# Altium PCB FPv1.3.2.PcbDoc (part 4 of 9)
Units mm, origin at the board's own origin, x right, y up, seen from the top; angles counter-clockwise.
Board outline 81.28 x 53.34 mm, 4 copper layers (Top Layer, GROUND PLANE, POWER PLANE, Bottom Layer); 98 components, 183 nets, 614 pads, 312 vias.
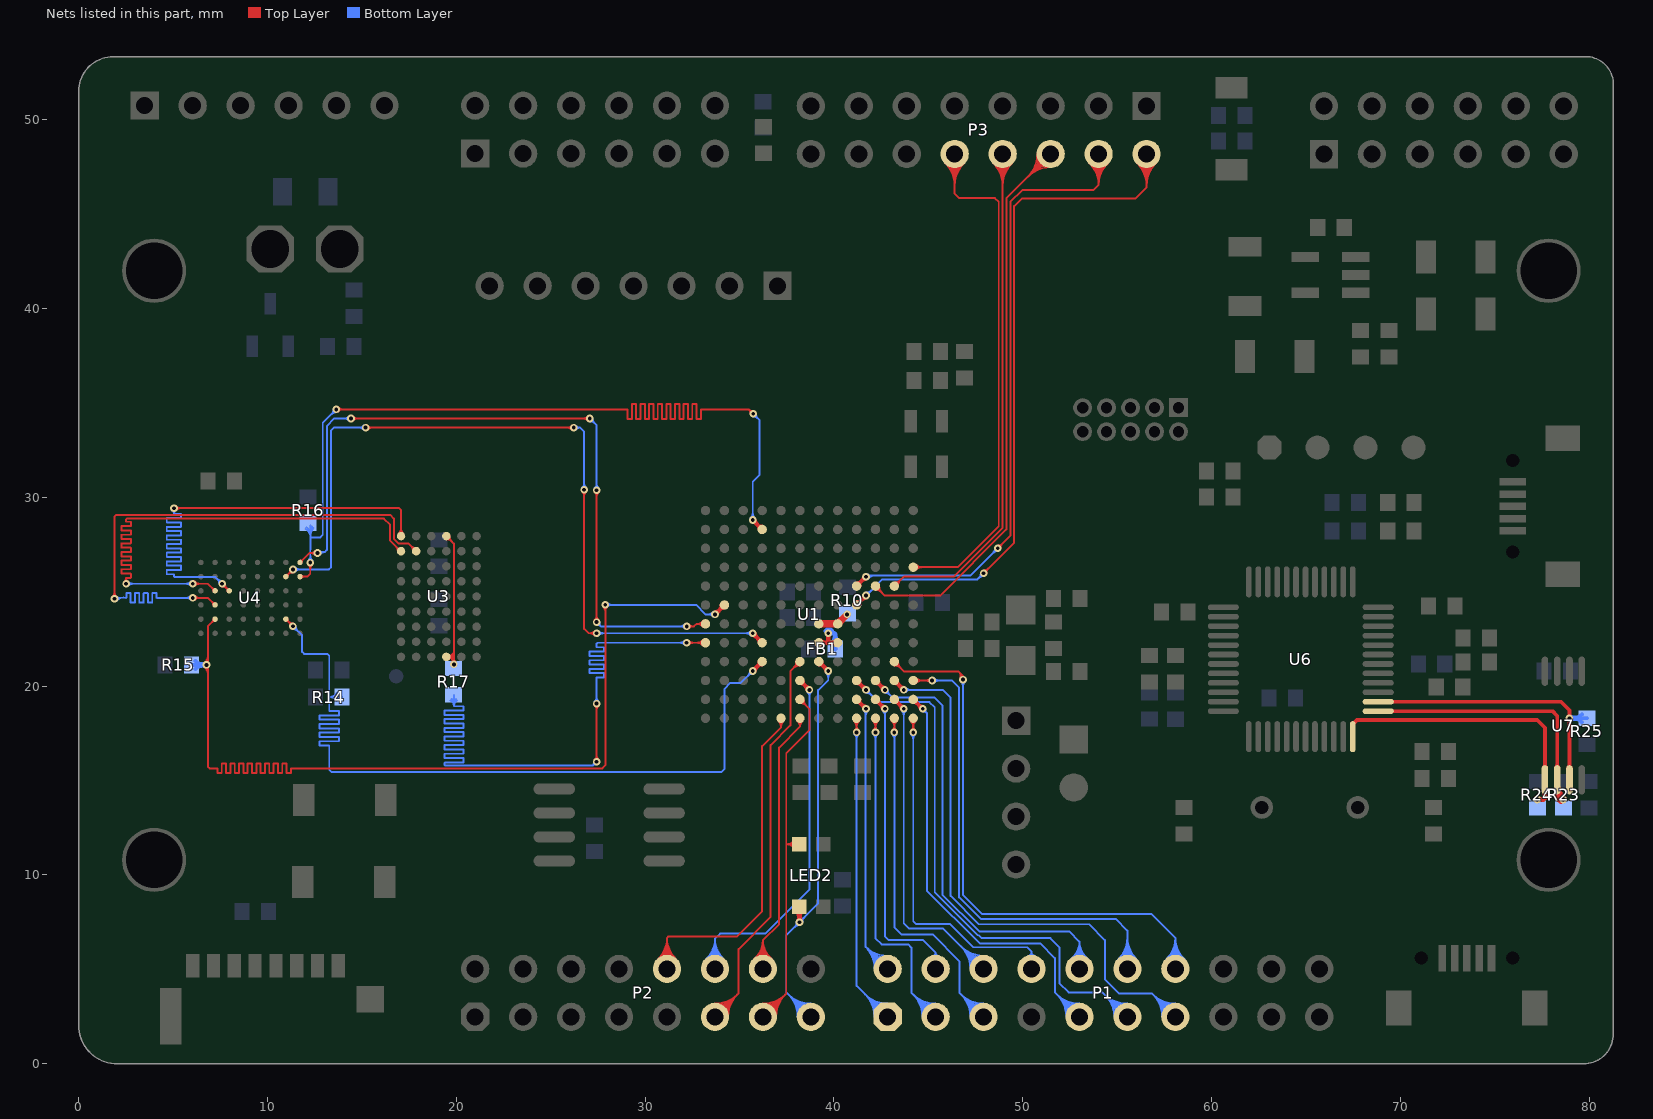
[diagram p6: the nets of this part, all layers, seen from the top]

## Via types
v1: diameter 0.403, hole 0.2, Top Layer to Bottom Layer, tented both sides, 261 vias
v2: diameter 0.503, hole 0.3, Top Layer to Bottom Layer, tented both sides, 25 vias
v3: diameter 0.6, hole 0.4, Top Layer to Bottom Layer, tented both sides, 11 vias
v4: diameter 0.508, hole 0.33, Top Layer to Bottom Layer, tented both sides, 5 vias
v5: diameter 0.703, hole 0.4, Top Layer to Bottom Layer, tented both sides, 3 vias
v6: diameter 0.603, hole 0.4, Top Layer to Bottom Layer, tented both sides, 2 vias
v7: diameter 0.503, hole 0.25, Top Layer to Bottom Layer, tented both sides, 2 vias
v8: diameter 0.6, hole 0.24, Top Layer to Bottom Layer, tented both sides, 1 vias
v9: diameter 0.508, hole 0.349, Top Layer to Bottom Layer, tented both sides, 1 vias
v10: diameter 0.603, hole 0.3, Top Layer to Bottom Layer, tented both sides, 1 vias

## Nets (pads, with @x,y where several pads share a name; then routed paths per layer and width w, separated by ;. In a path a pad name is that pad's centre, name@x,y a point inside that pad or via, vN(x,y) a via of type N, cw(c..) or ccw(c..) an arc to the next point about the centre after c; other vN are vias at no path point) (continued)
ADDR13: U3.B1 U4.G3 | length 33.1
  Top Layer w0.102: v1@2.432,25.551 ccw(c2.331,25.705) 2.515,25.705 ; v1(2.515,25.425) 2.515,25.705 ; v1@2.597,25.551 cw(c2.698,25.705) 2.515,25.705 ; v1(6.05,25.425) 6.85,25.425 U4.G3@7.225,25.05 ; v1@6.157,25.318 cw(c6.414,25.061) 6.414,25.425 cw(c6.414,25.789) v1@6.157,25.532 ; U4.G3@7.131,25.05 ccw(c6.903,25.05) 7.064,25.211 ccw(c7.225,25.372) U4.G3@7.225,25.144 ; 16.793,27.411 cw(c16.531,27.15) U3.B1@16.901,27.15 ; U3.B1@17.075,27.15 17.054,27.15 16.494,27.71 16.494,28.54 16.166,28.868 2.562,28.868 2.515,28.82 2.515,28.729 ccw(c2.537,28.729) 2.537,28.706 2.746,28.706 cw(c2.746,28.683) 2.769,28.683 2.769,28.5 cw(c2.746,28.5) 2.746,28.477 2.515,28.477 2.283,28.477 ccw(c2.283,28.455) 2.261,28.455 2.261,28.272 ccw(c2.283,28.272) 2.283,28.249 2.515,28.249 2.746,28.249 cw(c2.746,28.226) 2.769,28.226 2.769,28.043 cw(c2.746,28.043) 2.746,28.02 2.515,28.02 2.283,28.02 ccw(c2.283,27.997) 2.261,27.997 2.261,27.815 ccw(c2.283,27.815) 2.283,27.792 2.515,27.792 2.746,27.792 cw(c2.746,27.769) 2.769,27.769 2.769,27.586 cw(c2.746,27.586) 2.746,27.563 2.515,27.563 2.283,27.563 ccw(c2.283,27.54) 2.261,27.54 2.261,27.357 ccw(c2.283,27.357) 2.283,27.334 2.515,27.334 2.746,27.334 cw(c2.746,27.312) 2.769,27.312 2.769,27.129 cw(c2.746,27.129) 2.746,27.106 2.515,27.106 2.283,27.106 ccw(c2.283,27.083) 2.261,27.083 2.261,26.9 ccw(c2.283,26.9) 2.283,26.877 2.515,26.877 2.746,26.877 cw(c2.746,26.854) 2.769,26.854 2.769,26.672 cw(c2.746,26.672) 2.746,26.649 2.515,26.649 2.283,26.649 ccw(c2.283,26.626) 2.261,26.626 2.261,26.443 ccw(c2.283,26.443) 2.283,26.42 2.515,26.42 2.746,26.42 cw(c2.746,26.397) 2.769,26.397 2.769,26.214 cw(c2.746,26.214) 2.746,26.191 2.515,26.191 2.283,26.191 ccw(c2.283,26.169) 2.261,26.169 2.261,25.986 ccw(c2.283,25.986) 2.283,25.963 2.515,25.963 2.746,25.963 cw(c2.746,25.94) 2.769,25.94 2.769,25.757 cw(c2.746,25.757) 2.746,25.734 2.537,25.734 ccw(c2.537,25.711) 2.515,25.711 2.515,25.705
  Bottom Layer w0.102: v1(2.515,25.425) v1(6.05,25.425) ; v1@2.621,25.319 cw(c2.877,25.063) 2.877,25.425 ; v1@2.621,25.532 ccw(c2.879,25.79) 2.879,25.425 ; v1@5.943,25.318 ccw(c5.686,25.061) 5.686,25.425 ccw(c5.686,25.789) v1@5.943,25.532
ADDR14: U3.B2 U4.G4 | length 34.2
  Top Layer w0.102: v1@1.793,24.732 ccw(c1.536,24.989) 1.9,24.989 ccw(c2.264,24.989) v1@2.007,24.732 ; v1(1.9,24.625) 1.9,28.975 1.996,29.071 16.496,29.071 16.698,28.87 16.698,27.794 16.941,27.55 17.475,27.55 U3.B2@17.875,27.15 ; v1(6.05,24.675) 6.85,24.675 U4.G4@7.225,24.3 ; v1@6.157,24.568 cw(c6.414,24.311) 6.414,24.675 cw(c6.414,25.039) v1@6.157,24.782 ; U4.G4@7.131,24.3 ccw(c6.903,24.3) 7.064,24.461 ccw(c7.225,24.622) U4.G4@7.225,24.394 ; U3.B2@17.701,27.15 ccw(c17.28,27.15) 17.578,27.447 ccw(c17.875,27.745) U3.B2@17.875,27.324
  Bottom Layer w0.102: v1@1.936,24.592 cw(c2.143,24.4) 2.132,24.682 ; v1@1.95,24.675 2.527,24.698 ; v1@2.002,24.736 ccw(c2.138,24.883) 2.146,24.683 ; v1@2.011,24.523 cw(c2.398,24.165) 2.377,24.692 ; 2.504,24.675 ccw(c2.504,24.698) 2.527,24.698 ; v1@5.943,24.568 ccw(c5.686,24.311) 5.686,24.675 ccw(c5.686,25.039) v1@5.943,24.782 ; v1(6.05,24.675) 4.15,24.675 cw(c4.15,24.698) 4.127,24.698 4.127,24.906 ccw(c4.105,24.906) 4.105,24.929 3.922,24.929 ccw(c3.922,24.906) 3.899,24.906 3.899,24.444 cw(c3.876,24.444) 3.876,24.421 3.693,24.421 cw(c3.693,24.444) 3.67,24.444 3.67,24.906 ccw(c3.647,24.906) 3.647,24.929 3.465,24.929 ccw(c3.465,24.906) 3.442,24.906 3.442,24.444 cw(c3.419,24.444) 3.419,24.421 3.236,24.421 cw(c3.236,24.444) 3.213,24.444 3.213,24.906 ccw(c3.19,24.906) 3.19,24.929 3.007,24.929 ccw(c3.007,24.906) 2.984,24.906 2.984,24.444 cw(c2.962,24.444) 2.962,24.421 2.779,24.421 cw(c2.779,24.444) 2.756,24.444 2.756,24.906 ccw(c2.733,24.906) 2.733,24.929 2.55,24.929 ccw(c2.55,24.906) 2.527,24.906 2.527,24.698
ADDR15: U3.A1 U4.F3 | length 33.8
  Top Layer w0.102: v1@5.157,29.318 cw(c5.411,29.064) 5.411,29.424 ; v1@5.157,29.532 ccw(c5.416,29.791) 5.416,29.424 ; v1@7.6,25.274 cw(c7.6,24.91) 7.857,25.168 cw(c8.115,25.425) v1@7.751,25.425 ; v1(7.6,25.425) U4.F3@7.975,25.05 ; U4.F3@7.881,25.05 ccw(c7.653,25.05) 7.814,25.211 ccw(c7.975,25.372) U4.F3@7.975,25.144 ; U3.A1@16.952,28.073 ccw(c16.654,28.371) 17.075,28.371 ccw(c17.496,28.371) U3.A1@17.198,28.073 ; U3.A1@17.075,27.95 17.075,29.325 16.976,29.424 v1@5.049,29.424 ; v1@5.049,29.424 v1(5.05,29.425)
  Bottom Layer w0.102: v1@4.968,29.298 cw(c4.872,29.149) 5.05,29.149 ; v1(5.05,29.425) 5.05,29.149 ; v1@5.132,29.298 ccw(c5.228,29.149) 5.05,29.149 ; v1@7.449,25.425 ccw(c7.085,25.425) 7.343,25.682 ccw(c7.6,25.94) v1@7.6,25.576 ; v1(7.6,25.425) 7.246,25.779 5.082,25.779 5.05,25.811 5.05,25.902 ccw(c5.027,25.902) 5.027,25.925 4.692,25.925 cw(c4.692,25.948) 4.669,25.948 4.669,26.131 cw(c4.692,26.131) 4.692,26.154 5.408,26.154 ccw(c5.408,26.177) 5.431,26.177 5.431,26.36 ccw(c5.408,26.36) 5.408,26.382 4.692,26.382 cw(c4.692,26.405) 4.669,26.405 4.669,26.588 cw(c4.692,26.588) 4.692,26.611 5.408,26.611 ccw(c5.408,26.634) 5.431,26.634 5.431,26.817 ccw(c5.408,26.817) 5.408,26.84 4.692,26.84 cw(c4.692,26.863) 4.669,26.863 4.669,27.045 cw(c4.692,27.045) 4.692,27.068 5.408,27.068 ccw(c5.408,27.091) 5.431,27.091 5.431,27.274 ccw(c5.408,27.274) 5.408,27.297 4.692,27.297 cw(c4.692,27.32) 4.669,27.32 4.669,27.503 cw(c4.692,27.503) 4.692,27.525 5.408,27.525 ccw(c5.408,27.548) 5.431,27.548 5.431,27.731 ccw(c5.408,27.731) 5.408,27.754 4.692,27.754 cw(c4.692,27.777) 4.669,27.777 4.669,27.96 cw(c4.692,27.96) 4.692,27.983 5.408,27.983 ccw(c5.408,28.006) 5.431,28.006 5.431,28.188 ccw(c5.408,28.188) 5.408,28.211 4.692,28.211 cw(c4.692,28.234) 4.669,28.234 4.669,28.417 cw(c4.692,28.417) 4.692,28.44 5.408,28.44 ccw(c5.408,28.463) 5.431,28.463 5.431,28.646 ccw(c5.408,28.646) 5.408,28.668 4.692,28.668 cw(c4.692,28.691) 4.669,28.691 4.669,28.874 cw(c4.692,28.874) 4.692,28.897 5.408,28.897 ccw(c5.408,28.92) 5.431,28.92 5.431,29.103 ccw(c5.408,29.103) 5.408,29.126 5.073,29.126 cw(c5.073,29.149) 5.05,29.149
AGND: R10.2 U1.G6 U1.H6 | length 1.7
  Top Layer w0.381: U1.G6@39.2,23.3 U1.H6@40.2,23.3 v1(40.7,23.8)
ALE: R17.2 U3.A4 U3.J4 | length 11.8
  Top Layer w0.102: U3.J4@19.475,21.55 U3.J4@19.65,21.55 ; U3.A4@19.475,27.776 cw(c19.475,27.355) 19.772,27.653 cw(c20.07,27.95) U3.A4@19.649,27.95 ; U3.A4@19.475,27.95 19.875,27.55 19.875,27.3 19.875,21.775 ; U3.J4@19.608,21.438 cw(c19.85,21.233) 19.85,21.55 ; U3.J4@19.608,21.662 ccw(c19.85,21.867) 19.85,21.55 ; v1@19.759,21.246 ccw(c19.643,21.343) 19.75,21.45 ; 19.829,21.371 cw(c19.729,21.272) v1@19.837,21.181 ; 19.85,21.453 cw(c19.572,21.453) 19.768,21.257 ccw(c19.511,21.514) 19.875,21.514 ccw(c20.239,21.514) v1@19.982,21.257 ; 19.85,21.55 ccw(c20.242,21.55) v1@19.977,21.261 ; U3.J4@19.65,21.55 19.763,21.663 ; U3.J4@19.65,21.55 19.85,21.55 ; U3.J4@19.65,21.55 19.75,21.45 ; 19.75,21.45 19.85,21.55 ; 19.75,21.45 19.85,21.35 ; 19.763,21.663 19.763,21.637 19.85,21.55 ; 19.763,21.663 19.85,21.75 ; 19.85,21.35 19.85,21.175 v1(19.875,21.15) ; 19.85,21.35 19.85,21.55 ; 19.85,21.35 19.875,21.325 v1(19.875,21.15) ; 19.85,21.55 19.85,21.75 ; 19.85,21.75 19.875,21.775 ; v1(19.875,21.15) 19.875,21.775
ANALOG1: P1.1 U1.J1 | length 26.7
  Top Layer w0.102: U1.J1@41.059,18.159 cw(c40.719,17.819) 41.2,17.819 cw(c41.681,17.819) U1.J1@41.341,18.159 ; v1@41.093,17.658 ccw(c40.836,17.915) 41.2,17.915 ccw(c41.564,17.915) v1@41.307,17.658 ; v1(41.2,17.551) U1.J1@41.2,18.3
  Bottom Layer w0.102: v1@41.093,17.445 cw(c40.836,17.188) 41.2,17.188 cw(c41.564,17.188) v1@41.307,17.445 ; v1(41.2,17.551) 41.2,4.13 P1.1@42.845,2.485 ; P1.1@42.146,2.485 ccw(c40.458,2.485) 41.651,3.679 ccw(c42.845,4.872) P1.1@42.845,3.184 ; P1.1@42.247,2.485 ccw(c40.805,2.485) 41.825,3.505 ccw(c42.845,4.525) P1.1@42.845,3.083 ; P1.1@42.349,2.485 ccw(c41.152,2.485) 41.998,3.332 ccw(c42.845,4.178) P1.1@42.845,2.981 ; P1.1@42.451,2.485 ccw(c41.498,2.485) 42.172,3.158 ccw(c42.845,3.832) P1.1@42.845,2.879
ANALOG2: P1.2 U1.J2 | length 27.1
  Top Layer w0.102: U1.J2@41.2,19.101 cw(c41.2,18.62) 41.54,18.96 cw(c41.88,19.3) U1.J2@41.399,19.3 ; U1.J2@41.2,19.3 v1(41.7,18.8) ; U1.J2@41.295,19.101 cw(c41.018,18.621) v1@41.554,18.762 ; U1.J2@41.399,19.205 ccw(c41.879,19.482) v1@41.738,18.946 ; 41.506,18.98 cw(c41.349,18.708) v1@41.653,18.788 ; 41.511,18.977 cw(c41.458,18.885) v1@41.558,18.85 ; 41.52,18.994 ccw(c41.792,19.151) v1@41.712,18.847 ; 41.523,18.989 ccw(c41.615,19.042) v1@41.65,18.942 ; v1@41.549,18.8 ccw(c41.185,18.8) 41.443,19.057 ccw(c41.7,19.315) v1@41.7,18.951 ; 41.537,18.962 ccw(c41.619,19.104) 41.661,18.946 cw(c41.619,19.104) 41.537,18.962 ; 41.538,18.963 cw(c41.396,18.881) 41.554,18.839 ccw(c41.396,18.881) 41.538,18.963
  Bottom Layer w0.102: v1@41.593,18.693 cw(c41.397,18.497) 41.675,18.497 ; 41.675,18.376 cw(c42.124,18.376) v1@41.807,18.693 ; v1@41.675,18.825 41.675,6.195 ; P1.2@42.146,5.035 ccw(c40.538,5.058) 41.675,6.195 ; P1.2@42.247,5.034 ccw(c40.873,5.053) 41.845,6.025 ccw(c42.817,6.997) P1.2@42.836,5.623 ; P1.2@42.349,5.032 ccw(c41.208,5.048) 42.015,5.855 ccw(c42.822,6.662) P1.2@42.838,5.521 ; P1.2@42.451,5.031 ccw(c41.544,5.044) 42.185,5.685 ccw(c42.826,6.326) P1.2@42.839,5.419 ; P1.2@42.835,5.724 cw(c42.812,7.332) 41.675,6.195 ; P1.2@42.845,5.025 41.675,6.195
ANALOG3: P1.3 U1.K1 | length 28.1
  Top Layer w0.102: U1.K1@42.059,18.159 cw(c41.719,17.819) 42.2,17.819 cw(c42.681,17.819) U1.K1@42.341,18.159 ; v1@42.093,17.658 ccw(c41.836,17.915) 42.2,17.915 ccw(c42.564,17.915) v1@42.307,17.658 ; v1(42.2,17.551) U1.K1@42.2,18.3
  Bottom Layer w0.102: v1@42.093,17.445 cw(c41.836,17.188) 42.2,17.188 cw(c42.564,17.188) v1@42.307,17.445 ; v1(42.2,17.551) 42.2,6.65 42.525,6.325 43.925,6.325 44.1,6.15 44.1,3.77 P1.3@45.385,2.485 ; P1.3@44.686,2.485 ccw(c42.998,2.485) 44.191,3.679 ccw(c45.385,4.872) P1.3@45.385,3.184 ; P1.3@44.787,2.485 ccw(c43.345,2.485) 44.365,3.505 ccw(c45.385,4.525) P1.3@45.385,3.083 ; P1.3@44.889,2.485 ccw(c43.692,2.485) 44.538,3.332 ccw(c45.385,4.178) P1.3@45.385,2.981 ; P1.3@44.991,2.485 ccw(c44.038,2.485) 44.712,3.158 ccw(c45.385,3.832) P1.3@45.385,2.879
ANALOG4: P1.4 U1.K2 | length 21.2
  Top Layer w0.102: U1.K2@42.2,19.101 cw(c42.2,18.62) 42.54,18.96 cw(c42.88,19.3) U1.K2@42.399,19.3 ; U1.K2@42.2,19.3 v1(42.7,18.8) ; U1.K2@42.295,19.101 cw(c42.018,18.621) v1@42.554,18.762 ; U1.K2@42.399,19.205 ccw(c42.879,19.482) v1@42.738,18.946 ; 42.506,18.98 cw(c42.349,18.708) v1@42.653,18.788 ; 42.511,18.977 cw(c42.458,18.885) v1@42.558,18.85 ; 42.52,18.994 ccw(c42.792,19.151) v1@42.712,18.847 ; 42.523,18.989 ccw(c42.615,19.042) v1@42.65,18.942 ; v1@42.549,18.8 ccw(c42.185,18.8) 42.443,19.057 ccw(c42.7,19.315) v1@42.7,18.951 ; 42.537,18.962 ccw(c42.619,19.104) 42.661,18.946 cw(c42.619,19.104) 42.537,18.962 ; 42.538,18.963 cw(c42.396,18.881) 42.554,18.839 ccw(c42.396,18.881) 42.538,18.963
  Bottom Layer w0.102: v1@42.593,18.693 cw(c42.336,18.436) 42.7,18.436 cw(c43.064,18.436) v1@42.807,18.693 ; v1(42.7,18.8) 42.7,6.75 42.903,6.547 44.728,6.547 45.385,5.89 ; P1.4@45.238,5.709 ccw(c45.2,5.89) 45.385,5.89 ; P1.4@45.385,5.025 45.385,5.89 ; P1.4@45.532,5.709 cw(c45.57,5.89) 45.385,5.89
ANALOG5: P1.5 U1.L1 | length 28.9
  Top Layer w0.102: U1.L1@43.059,18.159 cw(c42.719,17.819) 43.2,17.819 cw(c43.681,17.819) U1.L1@43.341,18.159 ; v1@43.093,17.658 ccw(c42.836,17.915) 43.2,17.915 ccw(c43.564,17.915) v1@43.307,17.658 ; v1(43.2,17.551) U1.L1@43.2,18.3
  Bottom Layer w0.102: v1@43.093,17.445 cw(c42.836,17.188) 43.2,17.188 cw(c43.564,17.188) v1@43.307,17.445 ; v1(43.2,17.551) 43.2,7.225 43.575,6.85 45.225,6.85 46.65,5.425 46.65,3.76 P1.5@47.925,2.485 ; P1.5@47.226,2.485 ccw(c45.538,2.485) 46.731,3.679 ccw(c47.925,4.872) P1.5@47.925,3.184 ; P1.5@47.327,2.485 ccw(c45.885,2.485) 46.905,3.505 ccw(c47.925,4.525) P1.5@47.925,3.083 ; P1.5@47.429,2.485 ccw(c46.232,2.485) 47.078,3.332 ccw(c47.925,4.178) P1.5@47.925,2.981 ; P1.5@47.531,2.485 ccw(c46.578,2.485) 47.252,3.158 ccw(c47.925,3.832) P1.5@47.925,2.879
ANALOG6: P1.6 U1.L2 | length 29.7
  Top Layer w0.102: U1.L2@43.2,19.101 cw(c43.2,18.62) 43.54,18.96 cw(c43.88,19.3) U1.L2@43.399,19.3 ; U1.L2@43.2,19.3 v1(43.7,18.8) ; U1.L2@43.295,19.101 cw(c43.018,18.621) v1@43.554,18.762 ; U1.L2@43.399,19.205 ccw(c43.879,19.482) v1@43.738,18.946 ; 43.506,18.98 cw(c43.349,18.708) v1@43.653,18.788 ; 43.511,18.977 cw(c43.458,18.885) v1@43.558,18.85 ; 43.52,18.994 ccw(c43.792,19.151) v1@43.712,18.847 ; 43.523,18.989 ccw(c43.615,19.042) v1@43.65,18.942 ; v1@43.549,18.8 ccw(c43.185,18.8) 43.443,19.057 ccw(c43.7,19.315) v1@43.7,18.951 ; 43.537,18.962 ccw(c43.619,19.104) 43.661,18.946 cw(c43.619,19.104) 43.537,18.962 ; 43.538,18.963 cw(c43.396,18.881) 43.554,18.839 ccw(c43.396,18.881) 43.538,18.963
  Bottom Layer w0.102: v1@43.593,18.693 cw(c43.336,18.436) 43.7,18.436 cw(c44.064,18.436) v1@43.807,18.693 ; v1(43.7,18.8) 43.7,7.45 43.975,7.175 45.775,7.175 P1.6@47.925,5.025 ; P1.6@47.226,5.025 ccw(c45.538,5.025) 46.731,6.219 ccw(c47.925,7.412) P1.6@47.925,5.724 ; P1.6@47.327,5.025 ccw(c45.885,5.025) 46.905,6.045 ccw(c47.925,7.065) P1.6@47.925,5.623 ; P1.6@47.429,5.025 ccw(c46.232,5.025) 47.078,5.872 ccw(c47.925,6.718) P1.6@47.925,5.521 ; P1.6@47.531,5.025 ccw(c46.578,5.025) 47.252,5.698 ccw(c47.925,6.372) P1.6@47.925,5.419
ANALOG7: P1.8 U1.M1 | length 21.7
  Top Layer w0.102: U1.M1@44.059,18.159 cw(c43.719,17.819) 44.2,17.819 cw(c44.681,17.819) U1.M1@44.341,18.159 ; v1@44.089,17.658 ccw(c43.823,17.925) 44.2,17.925 ; v1@44.2,17.555 U1.M1@44.2,18.3 ; 44.2,17.906 ccw(c44.55,17.906) v1@44.303,17.658
  Bottom Layer w0.102: v1@44.089,17.445 cw(c43.823,17.178) 44.2,17.178 ; 44.2,17.197 cw(c44.55,17.197) v1@44.303,17.445 ; v1@44.2,17.551 44.2,7.55 44.35,7.4 46.15,7.4 47.379,6.171 50.229,6.171 50.465,5.935 ; P1.8@50.285,5.701 ccw(c50.222,5.935) 50.465,5.935 ; P1.8@50.311,5.602 ccw(c50.258,5.803) 50.465,5.803 ccw(c50.672,5.803) P1.8@50.619,5.602 ; P1.8@50.465,5.025 50.465,5.935 ; P1.8@50.645,5.701 cw(c50.708,5.935) 50.465,5.935
  other v1: 44.196,17.551
ANALOG8: P1.9 U1.M2 | length 34.6
  Top Layer w0.102: U1.M2@44.2,19.101 cw(c44.2,18.62) 44.54,18.96 cw(c44.88,19.3) U1.M2@44.399,19.3 ; U1.M2@44.2,19.3 v1(44.7,18.8) ; U1.M2@44.295,19.101 cw(c44.018,18.621) v1@44.554,18.762 ; U1.M2@44.399,19.205 ccw(c44.879,19.482) v1@44.738,18.946 ; 44.506,18.98 cw(c44.349,18.708) v1@44.653,18.788 ; 44.511,18.977 cw(c44.458,18.885) v1@44.558,18.85 ; 44.52,18.994 ccw(c44.792,19.151) v1@44.712,18.847 ; 44.523,18.989 ccw(c44.615,19.042) v1@44.65,18.942 ; v1@44.549,18.8 ccw(c44.185,18.8) 44.443,19.057 ccw(c44.7,19.315) v1@44.7,18.951 ; 44.537,18.962 ccw(c44.619,19.104) 44.661,18.946 cw(c44.619,19.104) 44.537,18.962 ; 44.538,18.963 cw(c44.396,18.881) 44.554,18.839 ccw(c44.396,18.881) 44.538,18.963
  Bottom Layer w0.102: v1(44.7,18.8) 44.925,18.575 ; v1@44.715,18.65 cw(c44.741,18.391) 44.925,18.575 ; v1@44.85,18.785 ccw(c45.109,18.759) 44.925,18.575 ; P1.9@52.306,2.485 ccw(c50.618,2.485) 51.811,3.679 ccw(c53.005,4.872) P1.9@53.005,3.184 ; P1.9@52.407,2.485 ccw(c50.965,2.485) 51.985,3.505 ccw(c53.005,4.525) P1.9@53.005,3.083 ; P1.9@52.509,2.485 ccw(c51.312,2.485) 52.158,3.332 ccw(c53.005,4.178) P1.9@53.005,2.981 ; P1.9@52.611,2.485 ccw(c51.658,2.485) 52.332,3.158 ccw(c53.005,3.832) P1.9@53.005,2.879 ; P1.9@53.005,2.485 51.7,3.79 51.7,5.602 50.928,6.374 47.726,6.374 44.925,9.175 44.925,18.575
ANALOG9: P1.10 U1.K3 | length 34.4
  Top Layer w0.102: U1.K3@42.2,20.101 cw(c42.2,19.62) 42.54,19.96 cw(c42.88,20.3) U1.K3@42.399,20.3 ; U1.K3@42.2,20.3 v1(42.7,19.8) ; U1.K3@42.295,20.101 cw(c42.018,19.621) v1@42.554,19.762 ; U1.K3@42.399,20.205 ccw(c42.879,20.482) v1@42.738,19.946 ; 42.506,19.98 cw(c42.349,19.708) v1@42.653,19.788 ; 42.511,19.977 cw(c42.458,19.885) v1@42.558,19.85 ; 42.52,19.994 ccw(c42.792,20.151) v1@42.712,19.847 ; 42.523,19.989 ccw(c42.615,20.042) v1@42.65,19.942 ; v1@42.549,19.8 ccw(c42.185,19.8) 42.443,20.057 ccw(c42.7,20.315) v1@42.7,19.951 ; 42.537,19.962 ccw(c42.619,20.104) 42.661,19.946 cw(c42.619,20.104) 42.537,19.962 ; 42.538,19.963 cw(c42.396,19.881) 42.554,19.839 ccw(c42.396,19.881) 42.538,19.963
  Bottom Layer w0.102: v1@42.7,19.649 cw(c42.7,19.285) 42.957,19.543 cw(c43.215,19.8) v1@42.851,19.8 ; v1(42.7,19.8) 43.094,19.406 45.319,19.406 45.745,18.98 45.745,8.966 47.701,7.01 52.465,7.01 53.005,6.47 ; P1.10@52.571,5.573 ccw(c51.862,6.47) 53.005,6.47 ; P1.10@52.634,5.494 ccw(c52.028,6.26) 53.005,6.26 ccw(c53.982,6.26) P1.10@53.376,5.494 ; P1.10@52.697,5.414 ccw(c52.194,6.05) 53.005,6.05 ccw(c53.816,6.05) P1.10@53.313,5.414 ; P1.10@52.76,5.334 ccw(c52.36,5.84) 53.005,5.84 ccw(c53.65,5.84) P1.10@53.25,5.334 ; P1.10@53.005,5.025 53.005,6.47 ; P1.10@53.439,5.573 cw(c54.148,6.47) 53.005,6.47
ANALOG10: P1.11 U1.J3 | length 41.6
  Top Layer w0.102: U1.J3@41.2,20.101 cw(c41.2,19.62) 41.54,19.96 cw(c41.88,20.3) U1.J3@41.399,20.3 ; U1.J3@41.2,20.3 v1(41.7,19.8) ; U1.J3@41.295,20.101 cw(c41.018,19.621) v1@41.554,19.762 ; U1.J3@41.399,20.205 ccw(c41.879,20.482) v1@41.738,19.946 ; 41.506,19.98 cw(c41.349,19.708) v1@41.653,19.788 ; 41.511,19.977 cw(c41.458,19.885) v1@41.558,19.85 ; 41.52,19.994 ccw(c41.792,20.151) v1@41.712,19.847 ; 41.523,19.989 ccw(c41.615,20.042) v1@41.65,19.942 ; v1@41.549,19.8 ccw(c41.185,19.8) 41.443,20.057 ccw(c41.7,20.315) v1@41.7,19.951 ; 41.537,19.962 ccw(c41.619,20.104) 41.661,19.946 cw(c41.619,20.104) 41.537,19.962 ; 41.538,19.963 cw(c41.396,19.881) 41.554,19.839 ccw(c41.396,19.881) 41.538,19.963
  Bottom Layer w0.102: v1@41.7,19.649 cw(c41.7,19.285) 41.957,19.543 cw(c42.215,19.8) v1@41.851,19.8 ; v1(41.7,19.8) 42.348,19.152 42.551,19.152 42.553,19.154 42.847,19.154 42.849,19.152 43.551,19.152 43.553,19.154 43.847,19.154 43.849,19.152 44.551,19.152 44.553,19.154 45.057,19.154 45.339,18.872 45.339,9.085 47.617,6.807 47.675,6.807 47.827,6.655 51.46,6.655 51.943,6.172 51.943,4.267 52.426,3.785 54.215,3.785 55.515,2.485 P1.11@55.545,2.485 ; 54.3,3.7 ccw(c55.545,4.945) P1.11@55.545,3.184 ; 54.373,3.627 cw(c53.23,2.485) P1.11@54.846,2.485 ; 54.474,3.526 ccw(c55.545,4.598) P1.11@55.545,3.083 ; 54.546,3.454 cw(c53.577,2.485) P1.11@54.947,2.485 ; 54.647,3.353 ccw(c55.545,4.251) P1.11@55.545,2.981 ; 54.719,3.281 cw(c53.924,2.485) P1.11@55.049,2.485 ; 54.821,3.179 ccw(c55.545,3.904) P1.11@55.545,2.879 ; 54.893,3.107 cw(c54.271,2.485) P1.11@55.151,2.485 ; 54.994,3.006 ccw(c55.545,3.557) P1.11@55.545,2.778
ANALOG11: P1.12 U1.M3 | length 35.6
  Top Layer w0.102: U1.M3@44.2,20.3 v1(45.2,20.3) ; U1.M3@44.341,20.159 cw(c44.681,19.819) 44.681,20.3 cw(c44.681,20.781) U1.M3@44.341,20.441 ; v1@45.093,20.193 ccw(c44.836,19.936) 44.836,20.3 ccw(c44.836,20.664) v1@45.093,20.407
  Bottom Layer w0.102: v1(45.2,20.3) 46.248,20.3 46.634,19.914 46.634,8.814 47.777,7.671 54.929,7.671 55.545,7.055 P1.12@55.545,5.025 ; v1@45.307,20.193 cw(c45.564,19.936) 45.564,20.3 cw(c45.564,20.664) v1@45.307,20.407 ; P1.12@55.051,5.519 ccw(c53.857,6.713) 55.545,6.713 ccw(c57.233,6.713) P1.12@56.039,5.519 ; P1.12@55.122,5.448 ccw(c54.102,6.468) 55.545,6.468 ccw(c56.988,6.468) P1.12@55.968,5.448 ; P1.12@55.194,5.376 ccw(c54.348,6.222) 55.545,6.222 ccw(c56.742,6.222) P1.12@55.896,5.376 ; P1.12@55.266,5.304 ccw(c54.593,5.977) 55.545,5.977 ccw(c56.497,5.977) P1.12@55.824,5.304
ANALOG12: P1.13 U1.L3 | length 42
  Top Layer w0.102: U1.L3@43.2,20.101 cw(c43.2,19.62) 43.54,19.96 cw(c43.88,20.3) U1.L3@43.399,20.3 ; U1.L3@43.2,20.3 v1(43.7,19.8) ; U1.L3@43.295,20.101 cw(c43.018,19.621) v1@43.554,19.762 ; U1.L3@43.399,20.205 ccw(c43.879,20.482) v1@43.738,19.946 ; 43.506,19.98 cw(c43.349,19.708) v1@43.653,19.788 ; 43.511,19.977 cw(c43.458,19.885) v1@43.558,19.85 ; 43.52,19.994 ccw(c43.792,20.151) v1@43.712,19.847 ; 43.523,19.989 ccw(c43.615,20.042) v1@43.65,19.942 ; v1@43.549,19.8 ccw(c43.185,19.8) 43.443,20.057 ccw(c43.7,20.315) v1@43.7,19.951 ; 43.537,19.962 ccw(c43.619,20.104) 43.661,19.946 cw(c43.619,20.104) 43.537,19.962 ; 43.538,19.963 cw(c43.396,19.881) 43.554,19.839 ccw(c43.396,19.881) 43.538,19.963
  Bottom Layer w0.102: v1(43.7,19.8) 45.757,19.8 46.177,19.38 46.177,8.89 47.676,7.391 53.518,7.391 54.356,6.553 54.356,4.47 55.106,3.72 56.85,3.72 P1.13@58.085,2.485 ; v1@43.807,19.693 cw(c44.064,19.436) 44.064,19.8 cw(c44.064,20.164) v1@43.807,19.907 ; P1.13@57.386,2.485 ccw(c55.698,2.485) 56.891,3.679 ccw(c58.085,4.872) P1.13@58.085,3.184 ; P1.13@57.487,2.485 ccw(c56.045,2.485) 57.065,3.505 ccw(c58.085,4.525) P1.13@58.085,3.083 ; P1.13@57.589,2.485 ccw(c56.392,2.485) 57.238,3.332 ccw(c58.085,4.178) P1.13@58.085,2.981 ; P1.13@57.691,2.485 ccw(c56.738,2.485) 57.412,3.158 ccw(c58.085,3.832) P1.13@58.085,2.879
ANALOG13: P1.14 U1.L4 | length 39.4
  Top Layer w0.102: U1.L4@43.2,21.101 cw(c43.2,20.62) 43.54,20.96 cw(c43.88,21.3) U1.L4@43.399,21.3 ; U1.L4@43.2,21.3 43.725,20.775 46.6,20.775 ; v1@46.694,20.391 ccw(c46.331,20.506) 46.6,20.775 ; 46.718,20.657 cw(c46.51,20.449) v1@46.791,20.36 ; v1(46.838,20.345) 46.838,20.537 46.6,20.775
  Bottom Layer w0.102: v1@46.731,20.239 cw(c46.474,19.982) 46.838,19.982 cw(c47.201,19.982) v1@46.944,20.239 ; v1(46.838,20.345) 46.838,8.937 47.85,7.925 56.825,7.925 58.085,6.665 ; P1.14@57.601,5.53 ccw(c56.511,6.665) 58.085,6.665 ; P1.14@57.671,5.456 ccw(c56.74,6.427) 58.085,6.427 ccw(c59.43,6.427) P1.14@58.499,5.456 ; P1.14@57.742,5.383 ccw(c56.969,6.188) 58.085,6.188 ccw(c59.201,6.188) P1.14@58.428,5.383 ; P1.14@57.812,5.31 ccw(c57.197,5.95) 58.085,5.95 ccw(c58.973,5.95) P1.14@58.358,5.31 ; P1.14@58.085,5.025 58.085,6.665 ; P1.14@58.569,5.53 cw(c59.659,6.665) 58.085,6.665
AVDD: FB1.2 U1.G5 U1.H5 | length 5.3
  Top Layer w0.254: U1.G5@39.2,22.3 U1.H5@40.2,22.3 ; U1.G5@39.287,22.213 cw(c39.497,22.003) 39.497,22.3 cw(c39.497,22.597) U1.G5@39.287,22.387 ; 39.7,22.3 v1(39.7,22.8) ; U1.H5@40.113,22.213 ccw(c39.903,22.003) 39.903,22.3 ccw(c39.903,22.597) U1.H5@40.113,22.387
  Bottom Layer w0.254: v1@39.575,22.929 cw(c39.73,22.769) 39.888,22.926 ; v1(39.7,22.8) 40.014,22.8 40.07,22.744 ; v1@39.752,22.747 cw(c39.91,22.584) 40.07,22.744 ; FB1.2@39.877,22.214 ccw(c39.411,22.68) 40.07,22.68 ccw(c40.729,22.68) FB1.2@40.263,22.214 ; FB1.2@40.07,21.971 40.07,22.744
BE23_16: U1.A6 U4.A1 | length 47.3
  Top Layer w0.102: U4.A1@11.725,26.55 12.226,27.051 v1(12.649,27.051) ; U4.A1@11.725,26.644 ccw(c11.725,26.872) 11.886,26.711 ccw(c12.047,26.55) U4.A1@11.819,26.55 ; v1@12.543,26.944 ccw(c12.285,26.687) 12.285,27.051 ccw(c12.285,27.415) v1@12.543,27.158 ; v1(14.425,34.175) v1(27.075,34.175) ; v1@14.532,34.068 cw(c14.789,33.811) 14.789,34.175 cw(c14.789,34.539) v1@14.532,34.282 ; v1@26.968,34.068 ccw(c26.711,33.811) 26.711,34.175 ccw(c26.711,34.539) v1@26.968,34.282 ; v1@27.325,23.5 ccw(c27.068,23.757) 27.432,23.757 ccw(c27.796,23.757) v1@27.539,23.5 ; v1@27.325,30.272 cw(c27.068,30.015) 27.432,30.015 cw(c27.796,30.015) v1@27.539,30.272 ; v1@27.432,23.292 v1(27.432,30.378) ; v1@32.2,23.3 32.207,23.293 v1(32.207,23.165) 32.588,23.165 32.723,23.3 ; v1@32.314,23.058 cw(c32.571,22.801) 32.571,23.165 cw(c32.571,23.529) v1@32.314,23.271 ; U1.A6@33.058,23.16 ccw(c32.723,22.83) 32.723,23.3 ; U1.A6@33.058,23.44 cw(c32.723,23.77) 32.723,23.3 ; U1.A6@33.2,23.3 32.723,23.3
  Bottom Layer w0.102: v1(12.649,27.051) 12.598,27.102 13.03,27.102 ; v1@12.756,27.158 ccw(c12.89,27.292) 12.89,27.102 ; v1@12.774,26.966 cw(c13.03,26.792) 13.03,27.102 ; v1@14.318,34.068 ccw(c14.061,33.811) 14.061,34.175 ccw(c14.061,34.539) v1@14.318,34.282 ; v1(14.425,34.175) 13.55,34.175 13.15,33.775 13.15,27.222 13.03,27.102 ; v1@27.075,34.024 cw(c27.075,33.66) 27.332,33.918 cw(c27.59,34.175) v1@27.226,34.175 ; v1(27.075,34.175) 27.432,33.818 v1@27.432,30.36 ; v1@27.325,30.485 ccw(c27.068,30.742) 27.432,30.742 ccw(c27.796,30.742) v1@27.539,30.485 ; v1(27.432,23.393) 27.661,23.165 ; v1@27.445,23.243 cw(c27.469,22.973) 27.661,23.165 ; v1@27.582,23.38 ccw(c27.852,23.357) 27.661,23.165 ; v1@32.101,23.058 ccw(c31.843,22.801) 31.843,23.165 ccw(c31.843,23.529) v1@32.101,23.271 ; v1(32.207,23.165) 27.661,23.165
BE31_24: U1.D5 U4.B2 | length 53.7
  Top Layer w0.102: U4.B2@10.975,25.8 v1(11.354,26.179) ; U4.B2@10.975,25.894 ccw(c10.975,26.122) 11.136,25.961 ccw(c11.297,25.8) U4.B2@11.069,25.8 ; v1@11.203,26.179 cw(c10.839,26.179) 11.097,25.922 cw(c11.354,25.664) v1@11.354,26.028 ; v1(15.2,33.692) v1(26.225,33.692) ; v1@15.307,33.585 cw(c15.564,33.328) 15.564,33.692 cw(c15.564,34.055) v1@15.307,33.798 ; v1@26.118,33.585 ccw(c25.861,33.328) 25.861,33.692 ccw(c25.861,34.055) v1@26.118,33.798 ; v1@26.665,30.297 cw(c26.4,30.032) 26.775,30.032 ; 26.775,30.048 cw(c27.127,30.048) v1@26.878,30.297 ; v1@26.775,30.404 26.775,23.034 27.009,22.8 v1(27.432,22.8) ; v1@27.325,22.693 ccw(c27.068,22.436) 27.068,22.8 ccw(c27.068,23.164) v1@27.325,22.907 ; v1@35.662,22.654 cw(c35.521,22.118) U1.D5@36.001,22.395 ; v1@35.688,22.753 cw(c35.608,22.449) 35.88,22.606 ; v1@35.7,22.649 cw(c35.7,22.285) 35.957,22.543 cw(c36.215,22.8) v1@35.851,22.8 ; v1(35.7,22.8) U1.D5@36.2,22.3 ; v1@35.747,22.812 ccw(c36.051,22.892) 35.894,22.62 ; v1@35.75,22.658 cw(c35.785,22.558) 35.877,22.611 ; v1@35.842,22.75 ccw(c35.942,22.715) 35.889,22.623 ; v1@35.846,22.838 ccw(c36.382,22.979) U1.D5@36.105,22.499 ; U1.D5@36.001,22.3 ccw(c35.52,22.3) 35.86,22.64 ccw(c36.2,22.98) U1.D5@36.2,22.499 ; v1@35.739,22.654 cw(c35.781,22.496) 35.863,22.638 ccw(c35.781,22.496) v1@35.739,22.654 ; v1@35.846,22.761 ccw(c36.004,22.719) 35.862,22.637 cw(c36.004,22.719) v1@35.846,22.761
  Bottom Layer w0.102: v1(11.354,26.179) 13.25,26.179 13.372,26.3 13.372,33.547 13.517,33.692 v1(15.2,33.692) ; v1@11.46,26.072 cw(c11.718,25.815) 11.718,26.179 cw(c11.718,26.543) v1@11.46,26.285 ; v1@15.093,33.585 ccw(c14.836,33.328) 14.836,33.692 ccw(c14.836,34.055) v1@15.093,33.798 ; v1(26.225,33.692) 26.558,33.692 ; v1@26.338,33.592 cw(c26.558,33.398) 26.558,33.692 ; v1@26.338,33.791 ccw(c26.558,33.985) 26.558,33.692 ; v1@26.665,30.51 ccw(c26.4,30.776) 26.775,30.776 ; v1@26.775,30.378 26.775,33.475 26.558,33.692 ; 26.775,30.759 ccw(c27.127,30.759) v1@26.878,30.51 ; v1(27.432,22.8) v1(35.7,22.8) ; v1@27.539,22.693 cw(c27.796,22.436) 27.796,22.8 cw(c27.796,23.164) v1@27.539,22.907 ; v1@35.593,22.693 ccw(c35.336,22.436) 35.336,22.8 ccw(c35.336,23.164) v1@35.593,22.907
  other v1: 26.772,30.404
EECLK: R23.2 U6.1 U7.2 | length 16.1
  Top Layer w0.203: U6.1@68.825,18.675 78.05,18.675 78.304,18.421 U7.2@78.304,15.041 ; U7.2@78.252,15.693 ccw(c78.127,15.818) 78.304,15.818 ccw(c78.481,15.818) U7.2@78.356,15.693
  Top Layer w0.254: U7.2@78.304,14.342 ccw(c78.967,14.342) v1@78.498,13.873 ; U7.2@78.304,14.955 ccw(c79.58,14.955) v1@78.678,14.053 ; U7.2@78.304,15.041 78.304,14.046 78.35,14 v1(78.625,14)
EECS: R24.2 U6.48 U7.1 | length 16.1
  Top Layer w0.203: U6.48@67.475,17.325 67.475,17.975 67.7,18.2 77.25,18.2 77.654,17.796 U7.1@77.654,15.041 ; U6.48@67.475,18.048 ccw(c67.475,18.226) 67.6,18.1 ; U7.1@77.602,15.693 ccw(c77.477,15.818) 77.654,15.818 ccw(c77.831,15.818) U7.1@77.706,15.693
  Top Layer w0.254: v1(77.25,14) 77.575,14 77.654,14.079 ; v1@77.296,14.058 ccw(c77.464,14.269) 77.654,14.079 ; U7.1@77.654,15.041 77.654,14.079
EEDATA: R25.1 U6.2 U7.3 | length 18.1
  Top Layer w0.203: U6.2@68.825,19.175 78.5,19.175 78.954,18.721 78.954,18.275 U7.3@78.954,15.041 ; v1@78.879,18.229 cw(c78.699,18.049) 78.954,18.049 ; v1@78.879,18.371 ccw(c78.699,18.551) 78.954,18.551 ; U7.3@78.902,15.693 ccw(c78.777,15.818) 78.954,15.818 ccw(c79.131,15.818) U7.3@79.006,15.693 ; 78.954,18.069 cw(c79.181,18.069) v1@79.021,18.229 ; 78.954,18.531 ccw(c79.181,18.531) v1@79.021,18.371
  Bottom Layer w0.203: v1(78.95,18.3) R25.1@79.875,18.3 ; v1@79,18.213 cw(c79.189,17.886) 79.287,18.251 ; v1@79,18.387 ccw(c79.189,18.714) 79.287,18.349 ; v1@79.021,18.229 cw(c79.191,18.059) 79.191,18.3 cw(c79.191,18.541) v1@79.021,18.371 ; R25.1@79.614,18.089 ccw(c79.105,17.58) 79.105,18.3 ccw(c79.105,19.02) R25.1@79.614,18.511
FB_ALE: R17.1 U1.A5 | length 48.2
  Top Layer w0.102: v1@27.325,16.109 ccw(c27.068,16.366) 27.432,16.366 ccw(c27.796,16.366) v1@27.539,16.109 ; v1@27.325,18.969 cw(c27.068,18.712) 27.432,18.712 cw(c27.796,18.712) v1@27.539,18.969 ; v1(27.432,16.002) v1(27.432,19.075) ; v1(32.2,22.3) U1.A5@33.2,22.3 ; v1@32.307,22.193 cw(c32.564,21.936) 32.564,22.3 cw(c32.564,22.664) v1@32.307,22.407 ; U1.A5@33.059,22.159 ccw(c32.719,21.819) 32.719,22.3 ccw(c32.719,22.781) U1.A5@33.059,22.441
  Bottom Layer w0.102: R17.1@19.696,19.237 cw(c19.532,18.936) 19.875,18.936 ; R17.1@19.744,19.326 cw(c19.625,19.107) 19.875,19.107 ; 19.875,19.119 cw(c20.128,19.119) R17.1@19.994,19.334 ; R17.1@19.875,19.544 19.875,18.936 ; R17.1@20.048,19.248 ccw(c20.243,18.936) 19.875,18.936 ; v1@27.284,15.975 cw(c27.088,15.939) 27.229,15.799 ; v1@27.325,19.182 ccw(c27.068,19.439) 27.432,19.439 ccw(c27.796,19.439) v1@27.539,19.182 ; v1@27.405,15.854 ccw(c27.369,15.658) 27.229,15.799 ; v1(27.432,16.002) 27.229,15.799 ; v1(27.432,19.075) 27.432,20.46 27.813,20.46 27.813,20.688 27.051,20.688 27.051,20.917 27.813,20.917 27.813,21.145 27.051,21.145 27.051,21.374 27.813,21.374 27.813,21.603 27.051,21.603 27.051,21.831 27.813,21.831 27.813,22.06 27.432,22.06 27.432,22.25 27.482,22.3 v1(32.2,22.3) ; v1@32.093,22.193 ccw(c31.836,21.936) 31.836,22.3 ccw(c31.836,22.664) v1@32.093,22.407 ; 19.875,18.936 20.383,18.936 20.383,18.707 19.367,18.707 19.367,18.479 20.383,18.479 20.383,18.25 19.367,18.25 19.367,18.021 20.383,18.021 20.383,17.793 19.367,17.793 19.367,17.564 20.383,17.564 20.383,17.335 19.367,17.335 19.367,17.107 20.383,17.107 20.383,16.878 19.367,16.878 19.367,16.65 20.383,16.65 20.383,16.421 19.367,16.421 19.367,16.192 20.383,16.192 20.383,15.964 19.418,15.964 19.38,15.926 19.38,15.824 19.406,15.799 27.229,15.799
FB_CS0: R14.1 U1.D4 U4.B5 | length 53.5
  Top Layer w0.102: U4.B5@10.975,23.456 cw(c10.975,23.228) 11.136,23.389 cw(c11.297,23.55) U4.B5@11.069,23.55 ; U4.B5@10.975,23.55 v1(11.35,23.175) ; v1@11.199,23.175 ccw(c10.836,23.175) 11.093,23.432 ccw(c11.35,23.689) v1@11.35,23.326 ; v1@35.662,20.946 ccw(c35.521,21.482) U1.D4@36.001,21.205 ; v1@35.688,20.847 ccw(c35.608,21.151) 35.88,20.994 ; v1(35.7,20.8) U1.D4@36.2,21.3 ; v1@35.7,20.951 ccw(c35.7,21.315) 35.957,21.057 ccw(c36.215,20.8) v1@35.851,20.8 ; v1@35.747,20.788 cw(c36.051,20.708) 35.894,20.98 ; v1@35.75,20.942 ccw(c35.785,21.042) 35.877,20.989 ; v1@35.842,20.85 cw(c35.942,20.885) 35.889,20.977 ; v1@35.846,20.762 cw(c36.382,20.621) U1.D4@36.105,21.101 ; U1.D4@36.001,21.3 cw(c35.52,21.3) 35.86,20.96 cw(c36.2,20.62) U1.D4@36.2,21.101 ; v1@35.739,20.946 ccw(c35.781,21.104) 35.863,20.962 cw(c35.781,21.104) v1@35.739,20.946 ; v1@35.846,20.839 cw(c36.004,20.881) 35.862,20.963 ccw(c36.004,20.881) v1@35.846,20.839
  Bottom Layer w0.102: v1@11.35,23.024 cw(c11.35,22.66) 11.607,22.918 cw(c11.865,23.175) v1@11.501,23.175 ; v1(11.35,23.175) 11.831,22.694 11.831,21.819 11.946,21.704 13.171,21.704 13.275,21.6 13.275,18.682 13.783,18.682 13.783,18.453 12.767,18.453 12.767,18.224 13.783,18.224 13.783,17.996 12.767,17.996 12.767,17.767 13.783,17.767 13.783,17.539 12.767,17.539 12.767,17.31 13.783,17.31 13.783,17.081 12.767,17.081 12.767,16.853 13.275,16.853 13.275,15.579 13.411,15.443 34.036,15.443 34.2,15.607 34.2,19.849 34.519,20.168 35.068,20.168 v1(35.7,20.8) ; R14.1@13.665,19.223 ccw(c13.275,18.947) 13.275,19.425 ; R14.1@13.665,19.627 cw(c13.275,19.903) 13.275,19.425 ; R14.1@13.748,19.282 ccw(c13.471,19.086) 13.471,19.425 ccw(c13.471,19.764) R14.1@13.748,19.568 ; R14.1@13.95,19.425 13.275,19.425 ; v1@35.549,20.8 cw(c35.185,20.8) 35.443,20.543 cw(c35.7,20.285) v1@35.7,20.649
FB_OE: R16.1 U1.D11 U4.A2 | length 62.7
  Top Layer w0.102: U4.A2@11.725,25.8 12.109,25.8 12.268,25.959 v1(12.268,26.543) ; U4.A2@11.792,25.733 cw(c11.952,25.573) 11.952,25.8 cw(c11.952,26.027) U4.A2@11.792,25.867 ; v1@12.162,26.436 cw(c11.904,26.179) 12.268,26.179 cw(c12.632,26.179) v1@12.375,26.436 ; v1(13.65,34.658) 29.07,34.658 29.07,34.15 29.299,34.15 29.299,34.938 29.527,34.938 29.527,34.15 29.756,34.15 29.756,34.938 29.985,34.938 29.985,34.15 30.213,34.15 30.213,34.938 30.442,34.938 30.442,34.15 30.67,34.15 30.67,34.938 30.899,34.938 30.899,34.15 31.128,34.15 31.128,34.938 31.356,34.938 31.356,34.15 31.585,34.15 31.585,34.938 31.813,34.938 31.813,34.15 32.042,34.15 32.042,34.938 32.271,34.938 32.271,34.15 32.499,34.15 32.499,34.938 32.728,34.938 32.728,34.15 32.956,34.15 32.956,34.658 35.492,34.658 ; v1@13.757,34.552 cw(c14.014,34.294) 14.014,34.658 cw(c14.014,35.022) v1@13.757,34.765 ; v1@35.575,34.436 ccw(c35.29,34.456) 35.492,34.658 ; v1@35.662,28.654 cw(c35.521,28.118) U1.D11@36.001,28.395 ; v1@35.688,28.753 cw(c35.608,28.449) 35.88,28.606 ; v1@35.7,28.649 cw(c35.7,28.285) 35.957,28.543 cw(c36.215,28.8) v1@35.851,28.8 ; v1(35.7,28.8) U1.D11@36.2,28.3 ; v1@35.714,34.575 cw(c35.694,34.86) 35.492,34.658 ; v1(35.725,34.425) 35.492,34.658 ; v1@35.747,28.812 ccw(c36.051,28.892) 35.894,28.62 ; v1@35.75,28.658 cw(c35.785,28.558) 35.877,28.611 ; v1@35.842,28.75 ccw(c35.942,28.715) 35.889,28.623 ; v1@35.846,28.838 ccw(c36.382,28.979) U1.D11@36.105,28.499 ; U1.D11@36.001,28.3 ccw(c35.52,28.3) 35.86,28.64 ccw(c36.2,28.98) U1.D11@36.2,28.499 ; v1@35.739,28.654 cw(c35.781,28.496) 35.863,28.638 ccw(c35.781,28.496) v1@35.739,28.654 ; v1@35.846,28.761 ccw(c36.004,28.719) 35.862,28.637 cw(c36.004,28.719) v1@35.846,28.761
  Bottom Layer w0.102: R16.1@12.02,28.326 cw(c11.746,27.874) 12.275,27.874 ; R16.1@12.072,28.413 cw(c11.855,28.054) 12.275,28.054 ; v1@12.162,26.65 ccw(c11.906,26.909) 12.27,26.907 ccw(c12.634,26.905) v1@12.375,26.649 ; v1(12.268,26.543) 12.275,27.877 ; 12.275,27.963 cw(c12.862,27.963) R16.1@12.447,28.378 ; 12.275,28.208 cw(c12.617,28.208) R16.1@12.375,28.45 ; R16.1@12.275,28.5 12.275,27.877 ; v1@13.499,34.658 cw(c13.135,34.658) 13.393,34.401 cw(c13.65,34.144) v1@13.65,34.508 ; v1(13.65,34.658) 12.931,33.939 12.931,28.006 12.802,27.877 12.275,27.877 ; v1@35.593,28.907 ccw(c35.336,29.164) 35.7,29.164 ccw(c36.064,29.164) v1@35.807,28.907 ; v1(35.7,28.8) 35.7,30.823 36.068,31.191 36.068,34.082 v1(35.725,34.425) ; v1@35.725,34.274 cw(c35.725,33.91) 35.982,34.168 cw(c36.24,34.425) v1@35.876,34.425
FB_RW: R15.1 U1.B7 U4.G5 | length 62.9
  Top Layer w0.102: v1@6.668,21.018 cw(c6.23,20.58) 6.85,20.58 ; v1@6.668,21.232 ccw(c6.23,21.67) 6.85,21.67 ; v1@6.74,21.09 cw(c6.475,20.825) 6.85,20.825 ; v1@6.74,21.16 ccw(c6.475,21.425) 6.85,21.425 ; U4.G5@7.131,23.55 cw(c6.903,23.55) 7.064,23.389 cw(c7.225,23.228) U4.G5@7.225,23.456 ; U4.G5@7.225,23.55 6.85,23.175 6.85,15.731 6.934,15.646 7.353,15.646 7.353,15.392 7.582,15.392 7.582,15.9 7.81,15.9 7.81,15.392 8.039,15.392 8.039,15.9 8.268,15.9 8.268,15.392 8.496,15.392 8.496,15.9 8.725,15.9 8.725,15.392 8.954,15.392 8.954,15.9 9.182,15.9 9.182,15.392 9.411,15.392 9.411,15.9 9.639,15.9 9.639,15.392 9.868,15.392 9.868,15.9 10.096,15.9 10.096,15.392 10.325,15.392 10.325,15.9 10.554,15.9 10.554,15.392 10.782,15.392 10.782,15.9 11.011,15.9 11.011,15.392 11.239,15.392 11.239,15.646 27.737,15.646 27.9,15.81 v1@27.9,24.3 ; v1@27.783,24.201 cw(c27.499,23.918) 27.9,23.918 ; 27.9,23.97 cw(c28.227,23.97) v1@27.996,24.201 ; v1@33.662,23.946 ccw(c33.521,24.482) U1.B7@34.001,24.205 ; v1@33.688,23.847 ccw(c33.608,24.151) 33.88,23.994 ; v1(33.7,23.8) U1.B7@34.2,24.3 ; v1@33.7,23.951 ccw(c33.7,24.315) 33.957,24.057 ccw(c34.215,23.8) v1@33.851,23.8 ; v1@33.747,23.788 cw(c34.051,23.708) 33.894,23.98 ; v1@33.75,23.942 ccw(c33.785,24.042) 33.877,23.989 ; v1@33.842,23.85 cw(c33.942,23.885) 33.889,23.977 ; v1@33.846,23.762 cw(c34.382,23.621) U1.B7@34.105,24.101 ; U1.B7@34.001,24.3 cw(c33.52,24.3) 33.86,23.96 cw(c34.2,23.62) U1.B7@34.2,24.101 ; v1@33.739,23.946 ccw(c33.781,24.104) 33.863,23.962 cw(c33.781,24.104) v1@33.739,23.946 ; v1@33.846,23.839 cw(c34.004,23.881) 33.862,23.963 ccw(c34.004,23.881) v1@33.846,23.839
  Bottom Layer w0.102: v1@27.889,24.3 32.698,24.3 33.198,23.8 v1(33.7,23.8) ; v1@27.996,24.201 cw(c28.234,23.963) 28.234,24.3 ; v1@27.996,24.414 ccw(c28.272,24.69) 28.272,24.3 ; v1@33.593,23.693 ccw(c33.336,23.436) 33.336,23.8 ccw(c33.336,24.164) v1@33.593,23.907
  Bottom Layer w0.203: R15.1@5.975,21.125 v1(6.775,21.125) ; R15.1@6.186,20.914 cw(c6.695,20.405) 6.695,21.125 cw(c6.695,21.845) R15.1@6.186,21.336 ; 6.489,21.07 cw(c6.569,20.769) v1@6.725,21.038 ; 6.489,21.18 ccw(c6.569,21.481) v1@6.725,21.212 ; v1@6.704,21.054 ccw(c6.534,20.884) 6.534,21.125 ccw(c6.534,21.366) v1@6.704,21.196
  other v1: 27.889,24.308
FTM0_CH3: P3.2 U1.J7 | length 50.2
  Top Layer w0.102: U1.J7@41.2,24.3 v1(41.7,24.8) ; U1.J7@41.2,24.499 ccw(c41.2,24.98) 41.54,24.64 ccw(c41.88,24.3) U1.J7@41.399,24.3 ; U1.J7@41.295,24.499 ccw(c41.018,24.979) v1@41.554,24.838 ; U1.J7@41.399,24.395 cw(c41.879,24.118) v1@41.738,24.654 ; 41.506,24.62 ccw(c41.349,24.892) v1@41.653,24.812 ; 41.511,24.623 ccw(c41.458,24.715) v1@41.558,24.75 ; 41.52,24.606 cw(c41.792,24.449) v1@41.712,24.753 ; 41.523,24.611 cw(c41.615,24.558) v1@41.65,24.658 ; v1@41.549,24.8 cw(c41.185,24.8) 41.443,24.543 cw(c41.7,24.285) v1@41.7,24.649 ; v1(47.925,25.975) 49.546,27.596 49.546,45.421 49.95,45.825 55.95,45.825 56.556,46.431 P3.2@56.556,48.185 ; v1@47.925,26.126 ccw(c47.925,26.49) 48.182,26.232 ccw(c48.44,25.975) v1@48.076,25.975 ; P3.2@56.062,47.691 cw(c54.868,46.497) 56.556,46.497 cw(c58.244,46.497) P3.2@57.05,47.691 ; P3.2@56.133,47.762 cw(c55.113,46.742) 56.556,46.742 cw(c57.999,46.742) P3.2@56.979,47.762 ; P3.2@56.205,47.834 cw(c55.359,46.988) 56.556,46.988 cw(c57.753,46.988) P3.2@56.907,47.834 ; P3.2@56.277,47.906 cw(c55.604,47.233) 56.556,47.233 cw(c57.508,47.233) P3.2@56.835,47.906 ; 41.537,24.638 cw(c41.619,24.496) 41.661,24.654 ccw(c41.619,24.496) 41.537,24.638 ; 41.538,24.637 ccw(c41.396,24.719) 41.554,24.761 cw(c41.396,24.719) 41.538,24.637
  Bottom Layer w0.102: v1(41.7,24.8) 42.554,25.654 47.604,25.654 v1(47.925,25.975) ; v1@41.7,24.951 ccw(c41.7,25.315) 41.957,25.057 ccw(c42.215,24.8) v1@41.851,24.8 ; v1@47.774,25.975 cw(c47.41,25.975) 47.668,25.718 cw(c47.925,25.46) v1@47.925,25.824
FTM0_CH4: P3.4 U1.J8 | length 46.8
  Top Layer w0.102: U1.J8@41.2,25.3 v1(41.7,25.8) ; U1.J8@41.2,25.499 ccw(c41.2,25.98) 41.54,25.64 ccw(c41.88,25.3) U1.J8@41.399,25.3 ; U1.J8@41.295,25.499 ccw(c41.018,25.979) v1@41.554,25.838 ; U1.J8@41.399,25.395 cw(c41.879,25.118) v1@41.738,25.654 ; 41.506,25.62 ccw(c41.349,25.892) v1@41.653,25.812 ; 41.511,25.623 ccw(c41.458,25.715) v1@41.558,25.75 ; 41.52,25.606 cw(c41.792,25.449) v1@41.712,25.753 ; 41.523,25.611 cw(c41.615,25.558) v1@41.65,25.658 ; v1@41.549,25.8 cw(c41.185,25.8) 41.443,25.543 cw(c41.7,25.285) v1@41.7,25.649 ; v1(48.675,27.3) 49.342,27.967 49.342,45.642 49.975,46.275 53.725,46.275 54.016,46.566 ; v1@48.675,27.451 ccw(c48.675,27.815) 48.932,27.557 ccw(c49.19,27.3) v1@48.826,27.3 ; P3.4@53.537,47.676 cw(c52.491,46.566) 54.016,46.566 ; P3.4@53.606,47.75 cw(c52.713,46.801) 54.016,46.801 cw(c55.319,46.801) P3.4@54.426,47.75 ; P3.4@53.676,47.824 cw(c52.934,47.037) 54.016,47.037 cw(c55.098,47.037) P3.4@54.356,47.824 ; P3.4@53.746,47.898 cw(c53.156,47.272) 54.016,47.272 cw(c54.876,47.272) P3.4@54.286,47.898 ; P3.4@54.016,48.185 54.016,46.566 ; P3.4@54.495,47.676 ccw(c55.541,46.566) 54.016,46.566 ; 41.537,25.638 cw(c41.619,25.496) 41.661,25.654 ccw(c41.619,25.496) 41.537,25.638 ; 41.538,25.637 ccw(c41.396,25.719) 41.554,25.761 cw(c41.396,25.719) 41.538,25.637
  Bottom Layer w0.102: v1(41.7,25.8) 41.757,25.857 47.232,25.857 v1(48.675,27.3) ; v1@41.735,25.765 cw(c41.956,25.544) 41.956,25.857 ; v1@41.807,25.693 cw(c42.202,25.298) 42.202,25.857 ; v1@41.807,25.907 ccw(c41.926,26.026) 41.926,25.857 ; v1@48.524,27.3 cw(c48.16,27.3) 48.418,27.043 cw(c48.675,26.785) v1@48.675,27.149
FTM1_QDA: P3.6 U1.K8 | length 38.5
  Top Layer w0.102: U1.K8@42.2,25.101 cw(c42.2,24.62) 42.54,24.96 cw(c42.88,25.3) U1.K8@42.399,25.3 ; U1.K8@42.2,25.3 42.7,24.8 45.637,24.8 49.139,28.302 49.139,45.848 P3.6@51.476,48.185 ; P3.6@50.777,48.185 cw(c49.089,48.185) 50.282,46.991 cw(c51.476,45.798) P3.6@51.476,47.486 ; P3.6@50.878,48.185 cw(c49.436,48.185) 50.456,47.165 cw(c51.476,46.145) P3.6@51.476,47.587 ; P3.6@50.98,48.185 cw(c49.783,48.185) 50.629,47.338 cw(c51.476,46.492) P3.6@51.476,47.689 ; P3.6@51.082,48.185 cw(c50.129,48.185) 50.803,47.512 cw(c51.476,46.838) P3.6@51.476,47.791
FTM1_QDB: P3.8 U1.L8 | length 35.9
  Top Layer w0.102: U1.L8@43.2,25.3 43.7,25.8 46.35,25.8 48.936,28.386 P3.8@48.936,48.185 ; U1.L8@43.2,25.499 ccw(c43.2,25.98) 43.54,25.64 ccw(c43.88,25.3) U1.L8@43.399,25.3 ; P3.8@48.442,47.691 cw(c47.248,46.497) 48.936,46.497 cw(c50.624,46.497) P3.8@49.43,47.691 ; P3.8@48.513,47.762 cw(c47.493,46.742) 48.936,46.742 cw(c50.379,46.742) P3.8@49.359,47.762 ; P3.8@48.585,47.834 cw(c47.739,46.988) 48.936,46.988 cw(c50.133,46.988) P3.8@49.287,47.834 ; P3.8@48.657,47.906 cw(c47.984,47.233) 48.936,47.233 cw(c49.888,47.233) P3.8@49.215,47.906
FTM2_QDA: P3.10 U1.M9 | length 36.3
  Top Layer w0.102: U1.M9@44.2,26.3 46.562,26.3 48.728,28.466 48.728,45.647 48.525,45.85 46.625,45.85 46.396,46.079 P3.10@46.396,48.185 ; U1.M9@44.341,26.159 cw(c44.681,25.819) 44.681,26.3 cw(c44.681,26.781) U1.M9@44.341,26.441 ; P3.10@45.902,47.691 cw(c44.708,46.497) 46.396,46.497 cw(c48.084,46.497) P3.10@46.89,47.691 ; P3.10@45.973,47.762 cw(c44.953,46.742) 46.396,46.742 cw(c47.839,46.742) P3.10@46.819,47.762 ; P3.10@46.045,47.834 cw(c45.199,46.988) 46.396,46.988 cw(c47.593,46.988) P3.10@46.747,47.834 ; P3.10@46.117,47.906 cw(c45.444,47.233) 46.396,47.233 cw(c47.348,47.233) P3.10@46.675,47.906
FTM3_CH1: P2.10 U1.E1 | length 26.7
  Top Layer w0.102: P2.10@30.675,5.527 ccw(c29.563,6.675) 31.161,6.675 ; P2.10@30.745,5.454 ccw(c29.795,6.436) 31.161,6.436 ccw(c32.527,6.436) P2.10@31.577,5.454 ; P2.10@30.816,5.381 ccw(c30.027,6.196) 31.161,6.196 ccw(c32.295,6.196) P2.10@31.506,5.381 ; P2.10@30.887,5.308 ccw(c30.26,5.956) 31.161,5.956 ccw(c32.062,5.956) P2.10@31.435,5.308 ; P2.10@31.161,5.025 31.161,6.675 ; P2.10@31.647,5.527 cw(c32.759,6.675) 31.161,6.675 ; U1.E1@37.059,18.159 cw(c36.721,17.82) 37.2,17.82 ; U1.E1@37.2,18.3 37.2,17.82 ; U1.E1@37.341,18.159 ccw(c37.679,17.82) 37.2,17.82 ; 31.161,6.675 31.236,6.75 34.875,6.75 36.2,8.075 36.2,16.82 37.2,17.82
FTM3_CH2: P2.11 U1.F4 | length 29.7
  Top Layer w0.102: P2.11@33.701,2.485 34.95,3.734 34.95,6.075 36.65,7.775 36.65,16.875 37.7,17.925 37.7,20.8 U1.F4@38.2,21.3 ; P2.11@33.701,2.879 ccw(c33.701,3.832) 34.374,3.158 ccw(c35.048,2.485) P2.11@34.095,2.485 ; P2.11@33.701,2.981 ccw(c33.701,4.178) 34.548,3.332 ccw(c35.394,2.485) P2.11@34.197,2.485 ; P2.11@33.701,3.083 ccw(c33.701,4.525) 34.721,3.505 ccw(c35.741,2.485) P2.11@34.299,2.485 ; P2.11@33.701,3.184 ccw(c33.701,4.872) 34.895,3.679 ccw(c36.088,2.485) P2.11@34.4,2.485 ; U1.F4@38.001,21.3 cw(c37.52,21.3) 37.86,20.96 cw(c38.2,20.62) U1.F4@38.2,21.101
FTM3_CH3: P2.12 U1.F3 | length 30.7
  Top Layer w0.102: U1.F3@38.2,20.101 cw(c38.2,19.62) 38.54,19.96 ; U1.F3@38.2,20.3 v1(38.7,19.8) ; U1.F3@38.295,20.101 cw(c38.018,19.621) v1@38.554,19.762 ; U1.F3@38.399,20.205 ccw(c38.879,20.482) v1@38.738,19.946 ; U1.F3@38.399,20.3 ccw(c38.88,20.3) 38.54,19.96 ; 38.506,19.98 cw(c38.349,19.708) v1@38.653,19.788 ; 38.511,19.977 cw(c38.458,19.885) v1@38.558,19.85 ; 38.52,19.994 ccw(c38.792,20.151) v1@38.712,19.847 ; 38.523,19.989 ccw(c38.615,20.042) v1@38.65,19.942 ; v1@38.549,19.8 ccw(c38.185,19.8) 38.443,20.057 ccw(c38.7,20.315) v1@38.7,19.951 ; 38.537,19.962 ccw(c38.619,20.104) 38.661,19.946 cw(c38.619,20.104) 38.537,19.962 ; 38.538,19.963 cw(c38.396,19.881) 38.554,19.839 ccw(c38.396,19.881) 38.538,19.963
  Bottom Layer w0.102: P2.12@33.226,5.538 ccw(c32.218,6.626) 33.701,6.626 ; P2.12@33.295,5.463 ccw(c32.433,6.393) 33.701,6.393 ccw(c34.969,6.393) P2.12@34.107,5.463 ; P2.12@33.364,5.389 ccw(c32.649,6.161) 33.701,6.161 ccw(c34.753,6.161) P2.12@34.038,5.389 ; P2.12@33.433,5.314 ccw(c32.864,5.928) 33.701,5.928 ccw(c34.538,5.928) P2.12@33.969,5.314 ; P2.12@33.701,5.025 33.701,6.626 ; P2.12@34.176,5.538 cw(c35.184,6.626) 33.701,6.626 ; v1@38.593,19.693 cw(c38.336,19.436) 38.7,19.436 cw(c39.064,19.436) v1@38.807,19.693 ; v1(38.7,19.8) 38.7,9.225 36.375,6.9 33.975,6.9 33.701,6.626
FTM3_CH4: LED2.4 P2.13 U1.F2 | length 29.5
  Top Layer w0.102: P2.13@36.241,2.485 37.475,3.719 37.475,11.625 ; P2.13@36.241,2.879 ccw(c36.241,3.832) 36.914,3.158 ccw(c37.588,2.485) P2.13@36.635,2.485 ; P2.13@36.241,2.981 ccw(c36.241,4.178) 37.088,3.332 ccw(c37.934,2.485) P2.13@36.737,2.485 ; P2.13@36.241,3.083 ccw(c36.241,4.525) 37.261,3.505 ccw(c38.281,2.485) P2.13@36.839,2.485 ; P2.13@36.241,3.184 ccw(c36.241,4.872) 37.435,3.679 ccw(c38.628,2.485) P2.13@36.94,2.485 ; LED2.4@37.908,11.419 ccw(c37.476,11.072) 37.476,11.626 ; LED2.4@37.908,11.833 cw(c37.476,12.18) 37.476,11.626 ; LED2.4@37.987,11.483 ccw(c37.688,11.243) 37.688,11.626 ccw(c37.688,12.009) LED2.4@37.987,11.769 ; LED2.4@38.165,11.626 37.476,11.626 ; U1.F2@38.2,19.101 cw(c38.2,18.62) 38.54,18.96 ; U1.F2@38.2,19.3 38.7,18.8 38.7,17.675 37.475,16.45 37.475,11.625 ; U1.F2@38.399,19.3 ccw(c38.88,19.3) 38.54,18.96 ; 37.475,11.625 37.476,11.626
FTM3_CH5: P2.14 U1.F1 | length 21.8
  Top Layer w0.102: P2.14@35.787,5.557 ccw(c34.947,6.541) 36.241,6.541 ; P2.14@35.853,5.48 ccw(c35.135,6.321) 36.241,6.321 ccw(c37.347,6.321) P2.14@36.629,5.48 ; P2.14@35.919,5.402 ccw(c35.323,6.1) 36.241,6.1 ccw(c37.159,6.1) P2.14@36.563,5.402 ; P2.14@35.985,5.325 ccw(c35.511,5.88) 36.241,5.88 ccw(c36.971,5.88) P2.14@36.497,5.325 ; P2.14@36.241,5.025 36.241,6.541 ; P2.14@36.695,5.557 cw(c37.535,6.541) 36.241,6.541 ; U1.F1@38.066,18.153 cw(c37.791,17.85) 38.2,17.85 ; U1.F1@38.2,18.3 38.2,17.85 ; U1.F1@38.334,18.153 ccw(c38.609,17.85) 38.2,17.85 ; 36.241,6.541 37.1,7.4 37.1,16.75 38.2,17.85
FTM3_CH6: LED2.1 P2.15 U1.G4 | length 38.7
  Top Layer w0.102: LED2.1@37.932,8.091 cw(c37.344,7.503) v1@38.175,7.503 ; LED2.1@38.003,8.162 cw(c37.589,7.748) 38.175,7.748 ; v1@38.044,7.575 ccw(c37.727,7.758) 38.081,7.853 ; v1@38.068,7.607 ccw(c37.811,7.864) 38.175,7.864 ccw(c38.539,7.864) v1@38.282,7.607 ; 38.082,7.85 ccw(c38.431,7.944) v1@38.25,7.631 ; v1@38.1,7.631 ccw(c37.94,7.907) 38.248,7.824 ; v1@38.175,7.45 LED2.1@38.175,8.314 ; v1@38.175,7.551 cw(c38.938,7.551) LED2.1@38.398,8.091 ; 38.175,7.796 cw(c38.693,7.796) LED2.1@38.327,8.162 ; 38.265,7.886 ccw(c38.66,7.78) v1@38.306,7.575 ; U1.G4@39.2,21.101 cw(c39.2,20.62) 39.54,20.96 cw(c39.88,21.3) U1.G4@39.399,21.3 ; U1.G4@39.2,21.3 v1(39.7,20.8) ; U1.G4@39.295,21.101 cw(c39.018,20.621) v1@39.554,20.762 ; U1.G4@39.399,21.205 ccw(c39.879,21.482) v1@39.738,20.946 ; 39.506,20.98 cw(c39.349,20.708) v1@39.653,20.788 ; 39.511,20.977 cw(c39.458,20.885) v1@39.558,20.85 ; 39.52,20.994 ccw(c39.792,21.151) v1@39.712,20.847 ; 39.523,20.989 ccw(c39.615,21.042) v1@39.65,20.942 ; v1@39.549,20.8 ccw(c39.185,20.8) 39.443,21.057 ccw(c39.7,21.315) v1@39.7,20.951 ; 39.537,20.962 ccw(c39.619,21.104) 39.661,20.946 cw(c39.619,21.104) 39.537,20.962 ; 39.538,20.963 cw(c39.396,20.881) 39.554,20.839 ccw(c39.396,20.881) 39.538,20.963
  Bottom Layer w0.102: v1@38.024,7.5 cw(c37.66,7.5) 37.918,7.243 cw(c38.175,6.985) v1@38.175,7.349 ; P2.15@38.082,2.485 ccw(c36.394,2.485) 37.587,3.679 ccw(c38.781,4.872) P2.15@38.781,3.184 ; v1@38.175,7.651 ccw(c38.175,8.015) 38.432,7.757 ccw(c38.69,7.5) v1@38.326,7.5 ; P2.15@38.183,2.485 ccw(c36.741,2.485) 37.761,3.505 ccw(c38.781,4.525) P2.15@38.781,3.083 ; P2.15@38.285,2.485 ccw(c37.088,2.485) 37.934,3.332 ccw(c38.781,4.178) P2.15@38.781,2.981 ; P2.15@38.387,2.485 ccw(c37.434,2.485) 38.108,3.158 ccw(c38.781,3.832) P2.15@38.781,2.879 ; P2.15@38.781,2.485 37.475,3.791 37.475,6.8 39.167,8.492 39.167,19.787 39.7,20.32 v1(39.7,20.8) ; v1@39.593,20.693 cw(c39.336,20.436) 39.7,20.436 cw(c40.064,20.436) v1@39.807,20.693
  other v1: 38.175,7.5